# EAGLE board Plug_ATtint2313 (EAGLE 5.10)
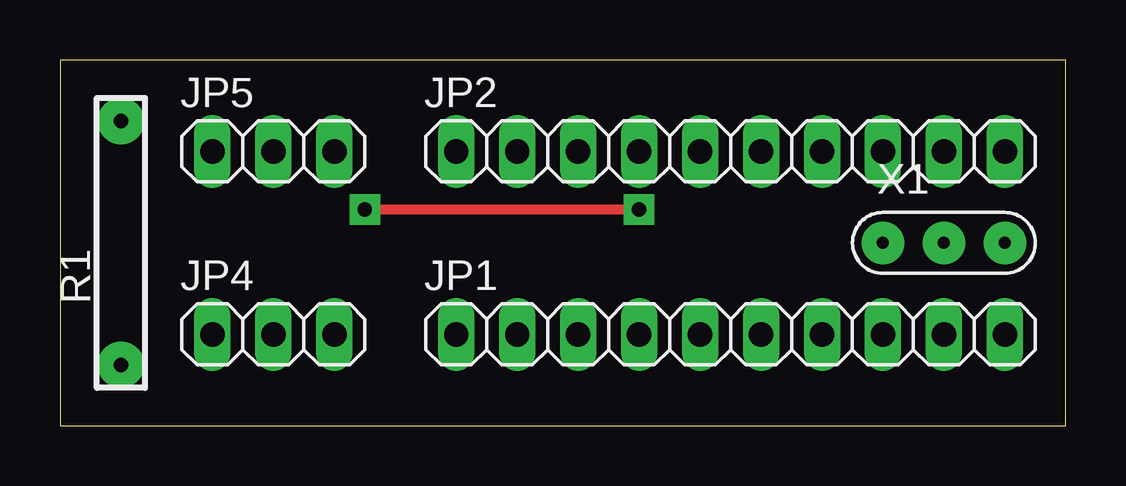
[diagram p0: board, top side]
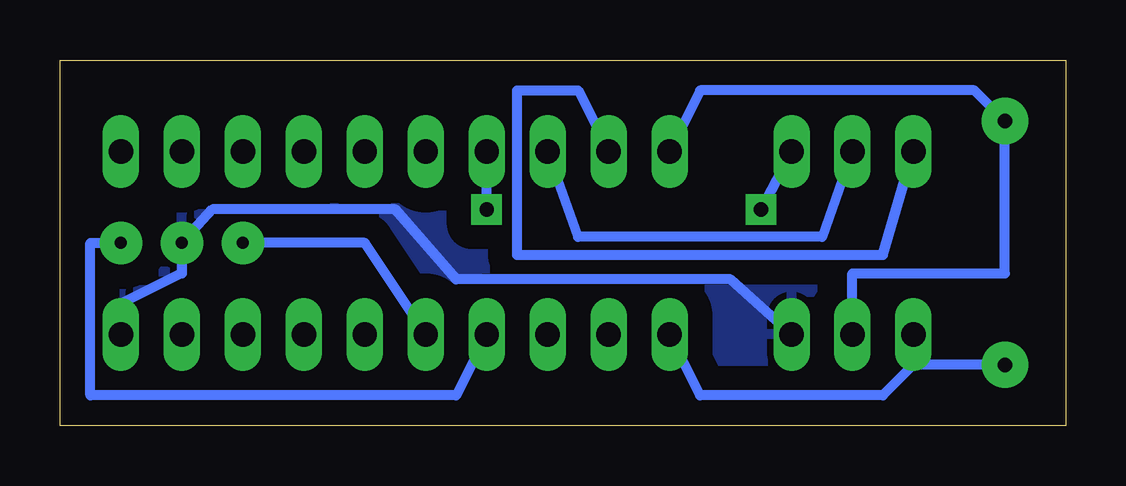
[diagram p1: board, bottom side, seen from below]

Size 41.91 x 15.24 mm. Coordinates in mm from the lower left corner, seen from the top.
Outline: 0,0 41.91,0 41.91,15.24 0,15.24 0,0
Copper layers (1*16): Top 0.035mm / dielectric 1.5mm / Bottom 0.035mm
Design rules "default": minimum track width 10mil, minimum drill 24mil, track to track 8mil, track to pad 8mil, pad to pad 8mil, via to via 8mil, smd to smd 8mil, copper to edge 40mil, drill to drill 8mil, minimum pad ring 10mil, minimum via ring 8mil, stop-mask expansion 4mil, vias tented up to drill 0mil, thermal gap 10mil

## Footprints (pad centres in the part's own frame; a part is rotated, then mirrored left to right if it is on the bottom)
1X10 = drill 1.016 long: 1 -11.43,0; 2 -8.89,0; 3 -6.35,0; 4 -3.81,0; 5 -1.27,0; 6 1.27,0; 7 3.81,0; 8 6.35,0; 9 8.89,0; 10 11.43,0
1X03 = drill 1.016 long: 1 -2.54,0; 2 0,0; 3 2.54,0
R_0.125W_4 = drill 0.6 pad 1.93 round: 1 -5.08,0; 2 5.08,0
CSTLS = drill 0.5 pad 1.778 round: 1 -2.54,0; 2 0,0; 3 2.54,0

## Placement (x,y rotation side)
JP1  [1X10]  27.94,3.81 0 top
JP2  [1X10]  27.94,11.43 0 top
JP4  [1X03]  8.89,3.81 0 top
JP5  [1X03]  8.89,11.43 0 top
R1  10K  [R_0.125W_4]  2.54,7.62 90 top
X1  16MHz  [CSTLS]  36.83,7.62 0 top

## Library data of the parts
JP1 JP2 JP4 JP5 = pinheader
R1 X1 = MyLib

## Nets
GND: JP1.10 JP4.3 X1.2
N$1: JP1.1 JP4.1 R1.1
N$2: JP2.4 JP5.3
N$3: JP2.3 JP5.2
N$4: JP2.2 JP5.1
N$7: JP1.4 X1.3
N$8: JP1.5 X1.1
VCC: JP2.1 JP4.2 R1.2

## Tracks (layer width: path | path; a pad name or v marks a point on that pad's centre or on a via)
GND
  Bottom 0.406: JP4.3 13.97,6.1 25.4,6.1 27.94,9.02 35.56,9.02 X1.2 36.83,6.35 39.37,5.08 JP1.10
  pour Bottom (isolate 1.016): 0,15.24 0,0 41.91,0 41.91,15.24
N$1
  Bottom 0.406: R1.1 6.35,2.54 | 6.35,2.54 7.62,1.27 15.24,1.27 JP1.1 | 6.35,2.54 JP4.1
N$2  (via drill 0.6 pad 1.27)
  Top 0.406: v12.7,9.02 v24.13,9.02
  Bottom 0.406: JP5.3 v12.7,9.02 | v24.13,9.02 JP2.4
N$3
  Bottom 0.406: JP5.2 10.16,7.87 20.32,7.87 JP2.3
N$4
  Bottom 0.406: JP5.1 7.62,7.11 22.86,7.11 22.86,13.97 20.32,13.97 JP2.2
N$7
  Bottom 0.406: JP1.4 25.4,1.27 40.64,1.27 40.64,7.62 X1.3
N$8
  Bottom 0.406: JP1.5 29.21,7.62 X1.1
VCC
  Bottom 0.406: JP4.2 8.89,6.35 2.54,6.35 R1.2 3.81,13.97 15.24,13.97 JP2.1